# Altium PCB Smartknob.PcbDoc (part 1 of 2)
Units mm, origin at the board's own origin, x right, y up, seen from the top; angles counter-clockwise.
Board outline 81.2 x 81.2 mm, 4 copper layers (Top Layer, Int1, Int2, Bottom Layer), stack 1.109 mm thick; 105 components, 69 nets, 354 pads, 140 vias.
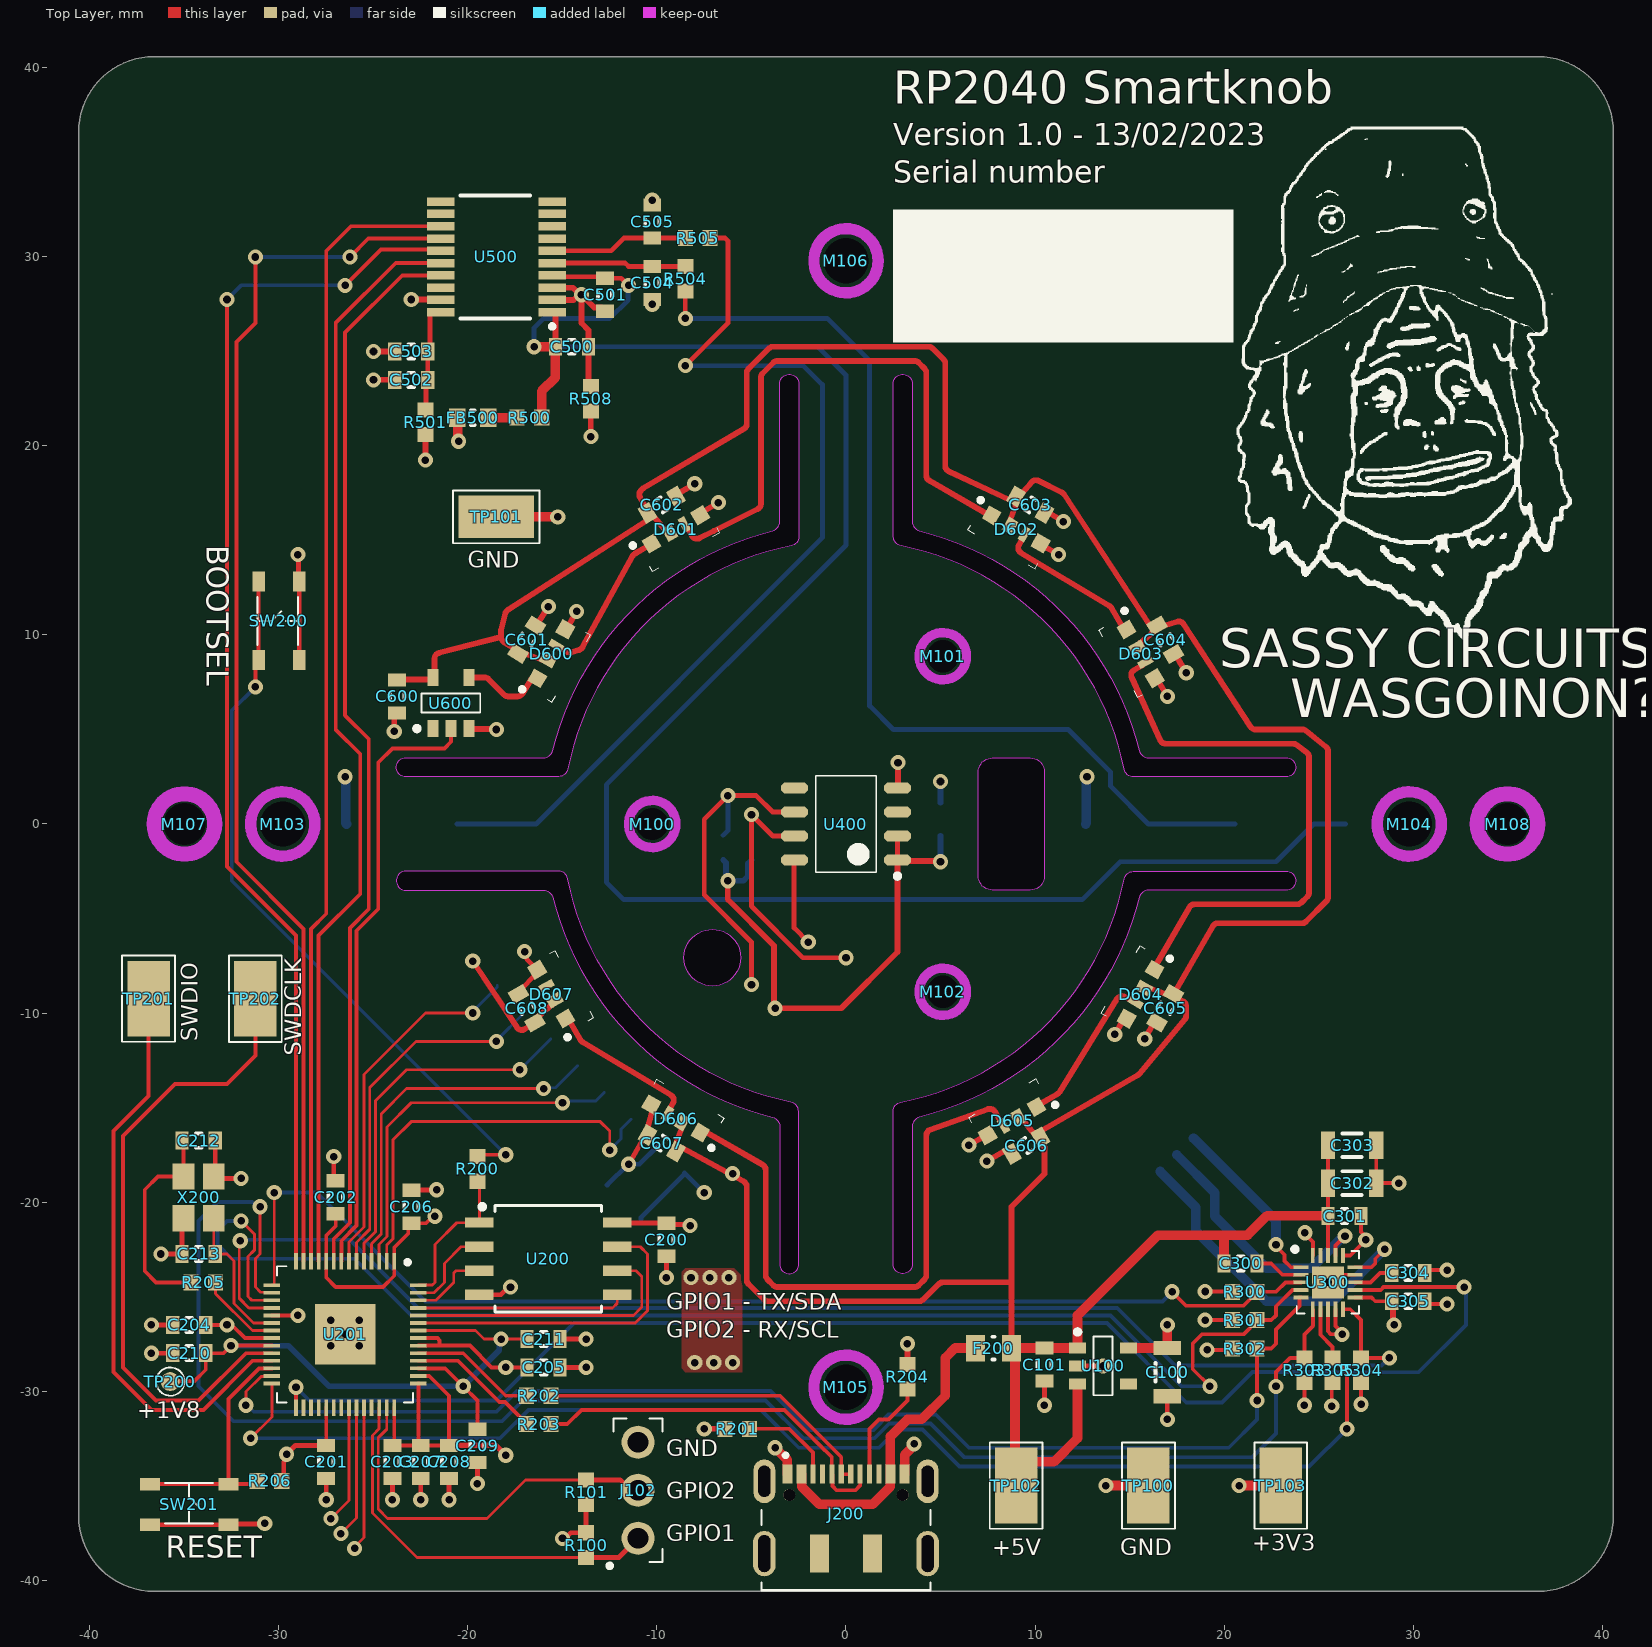
[diagram p0: Top Layer view]
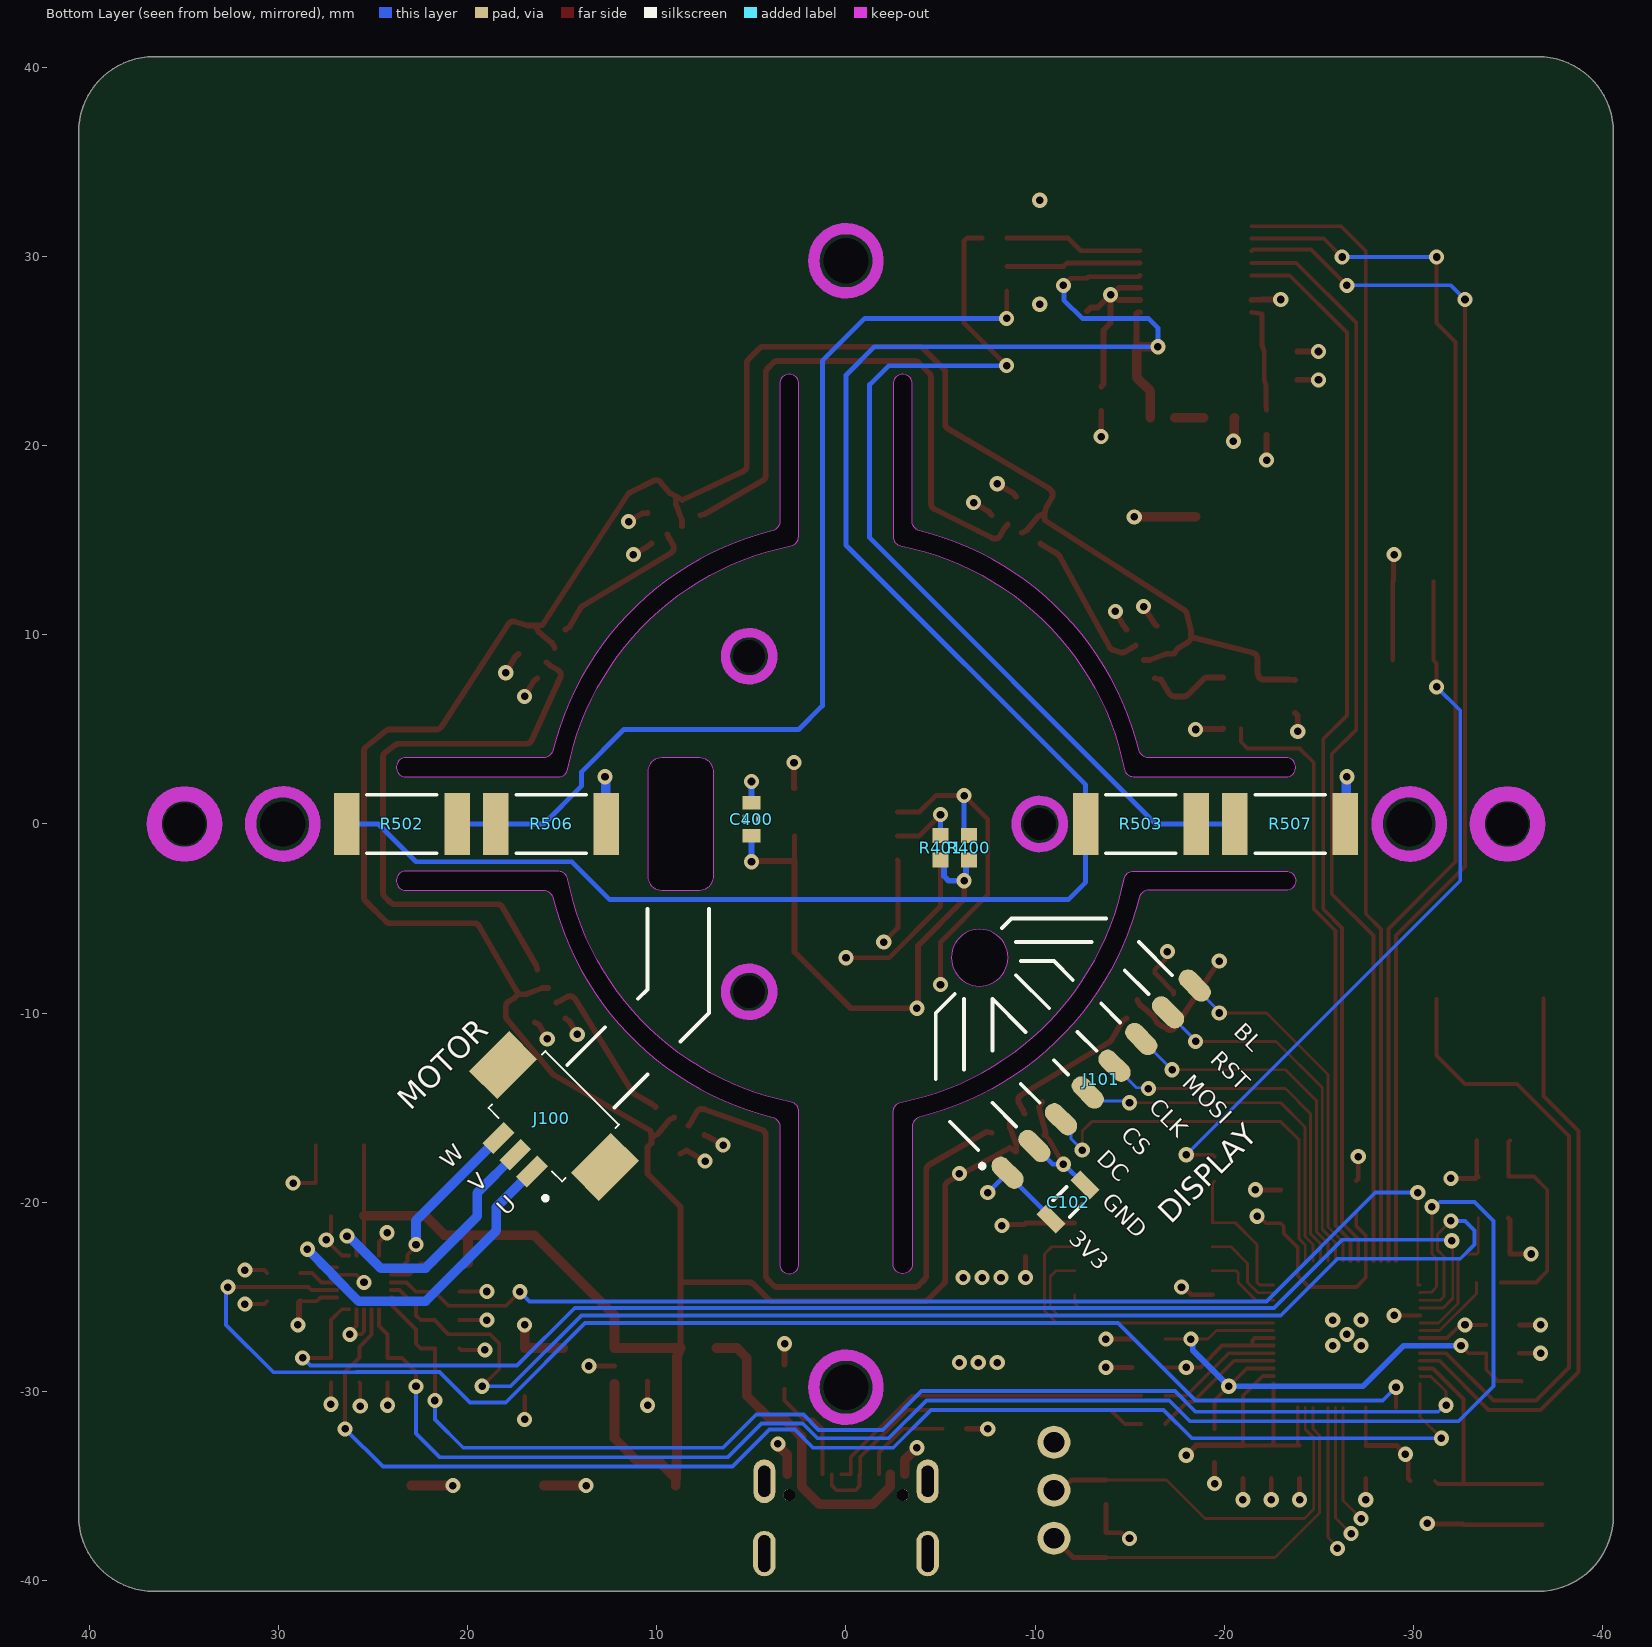
[diagram p1: Bottom Layer view, seen from below]
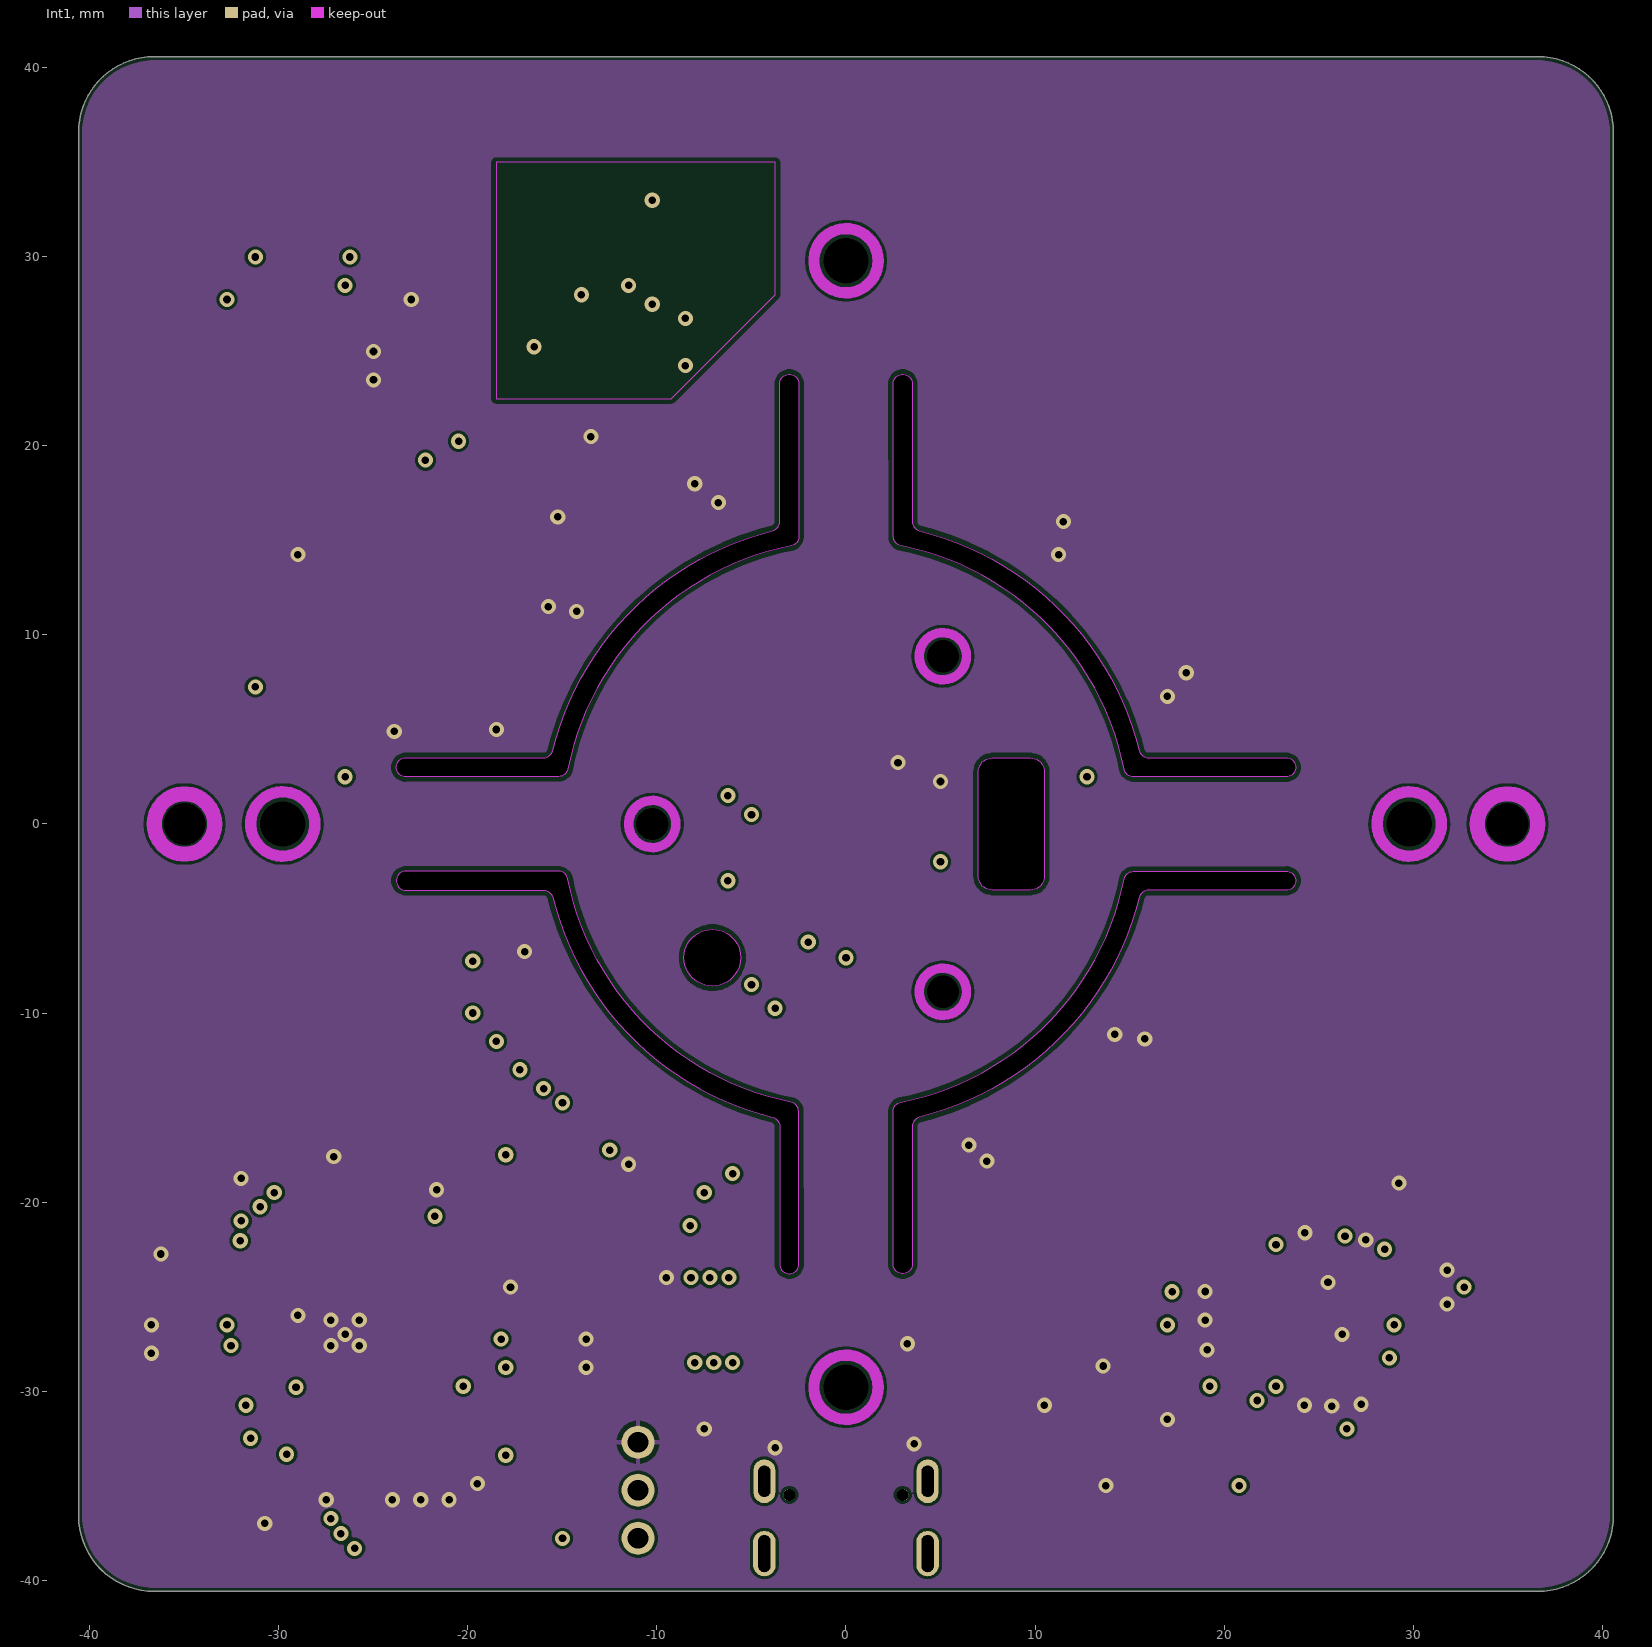
[diagram p2: Int1]
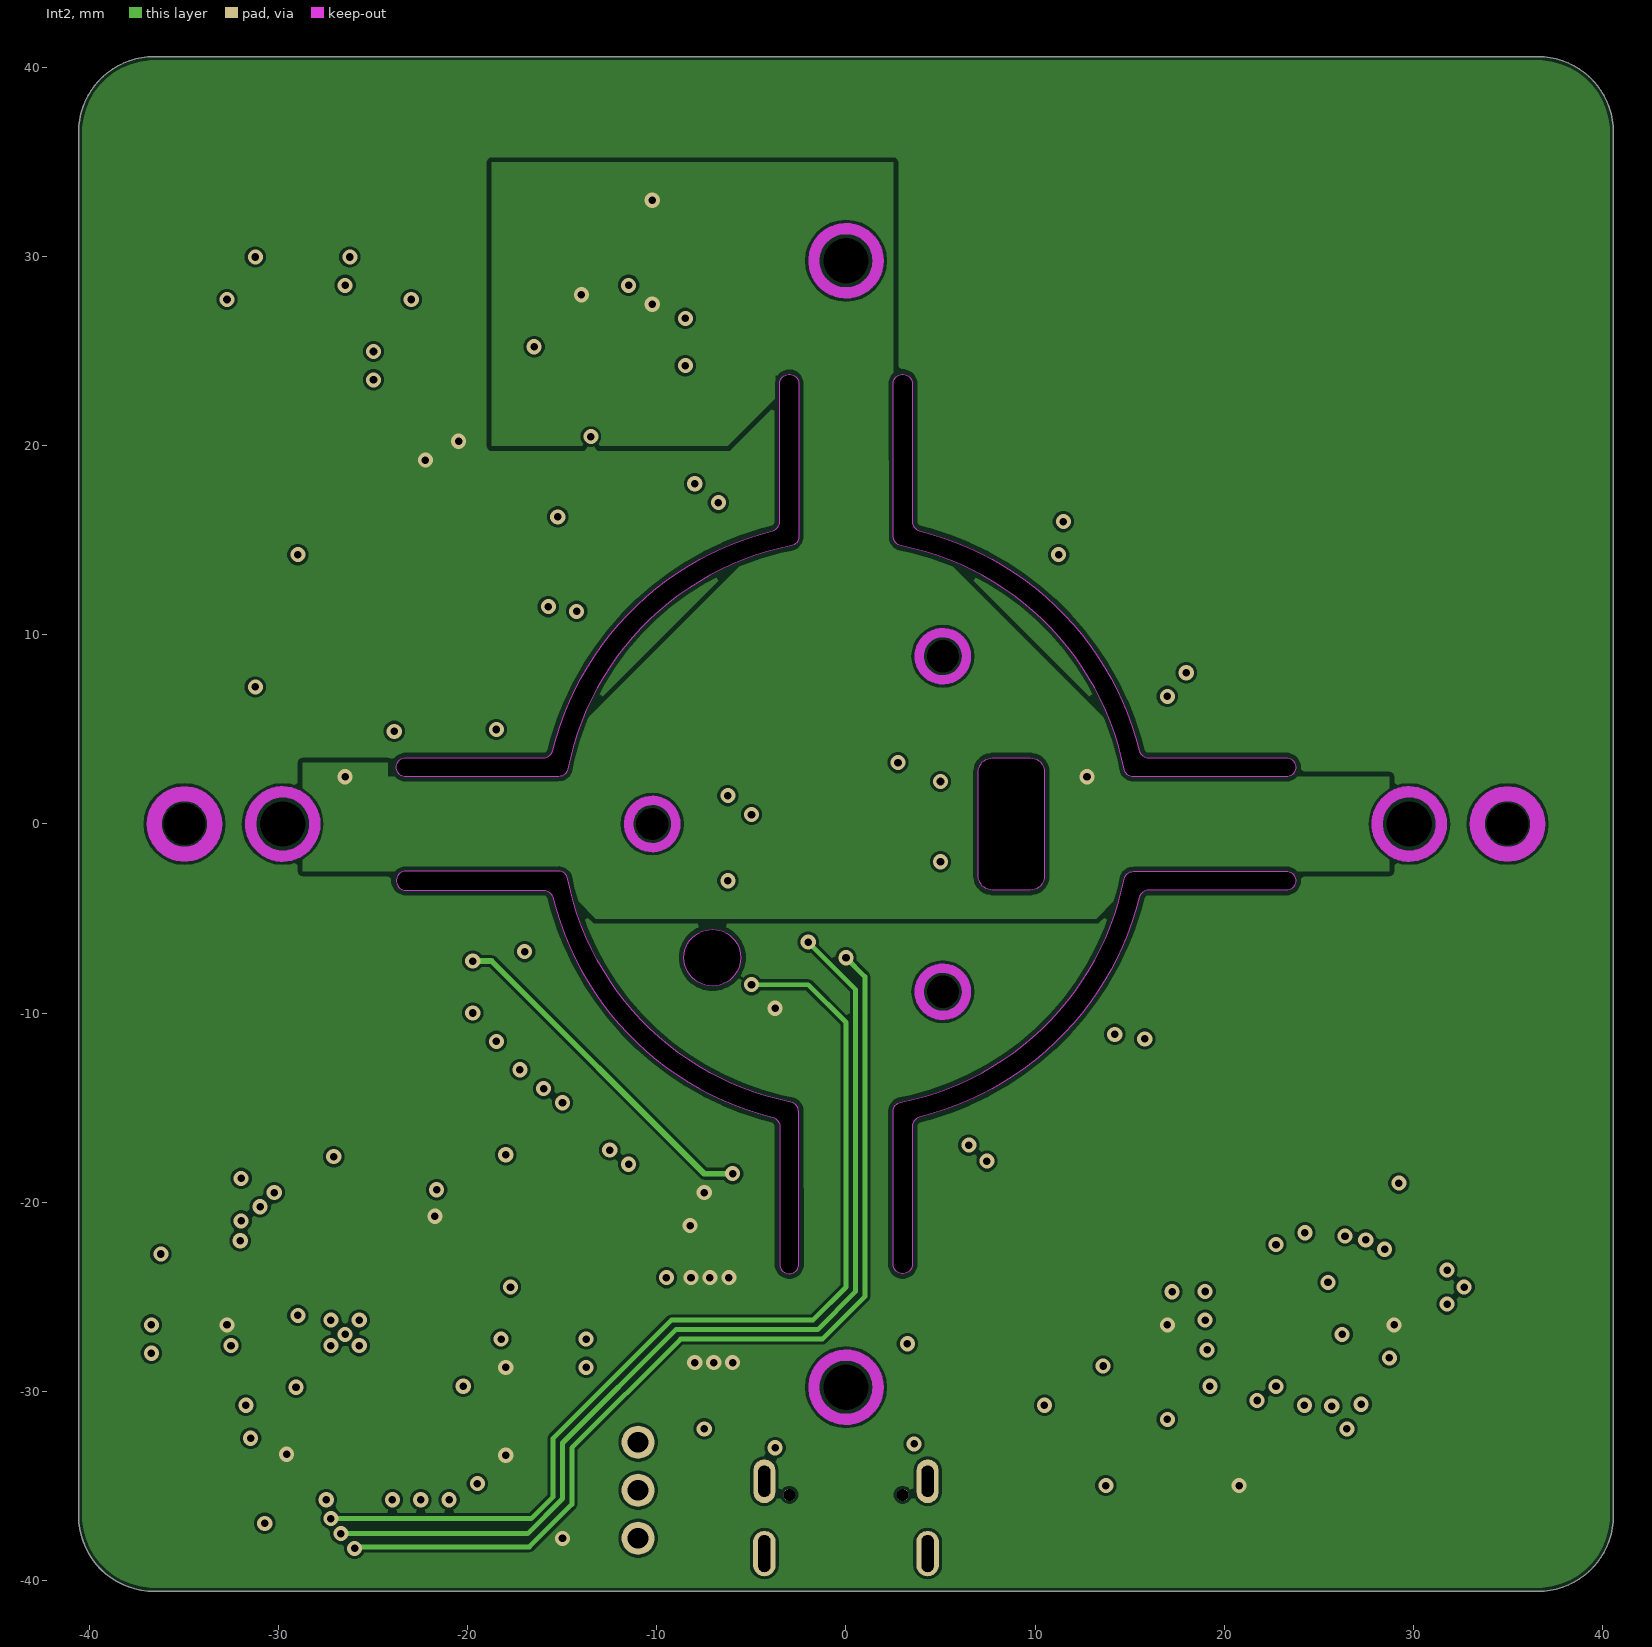
[diagram p3: Int2]
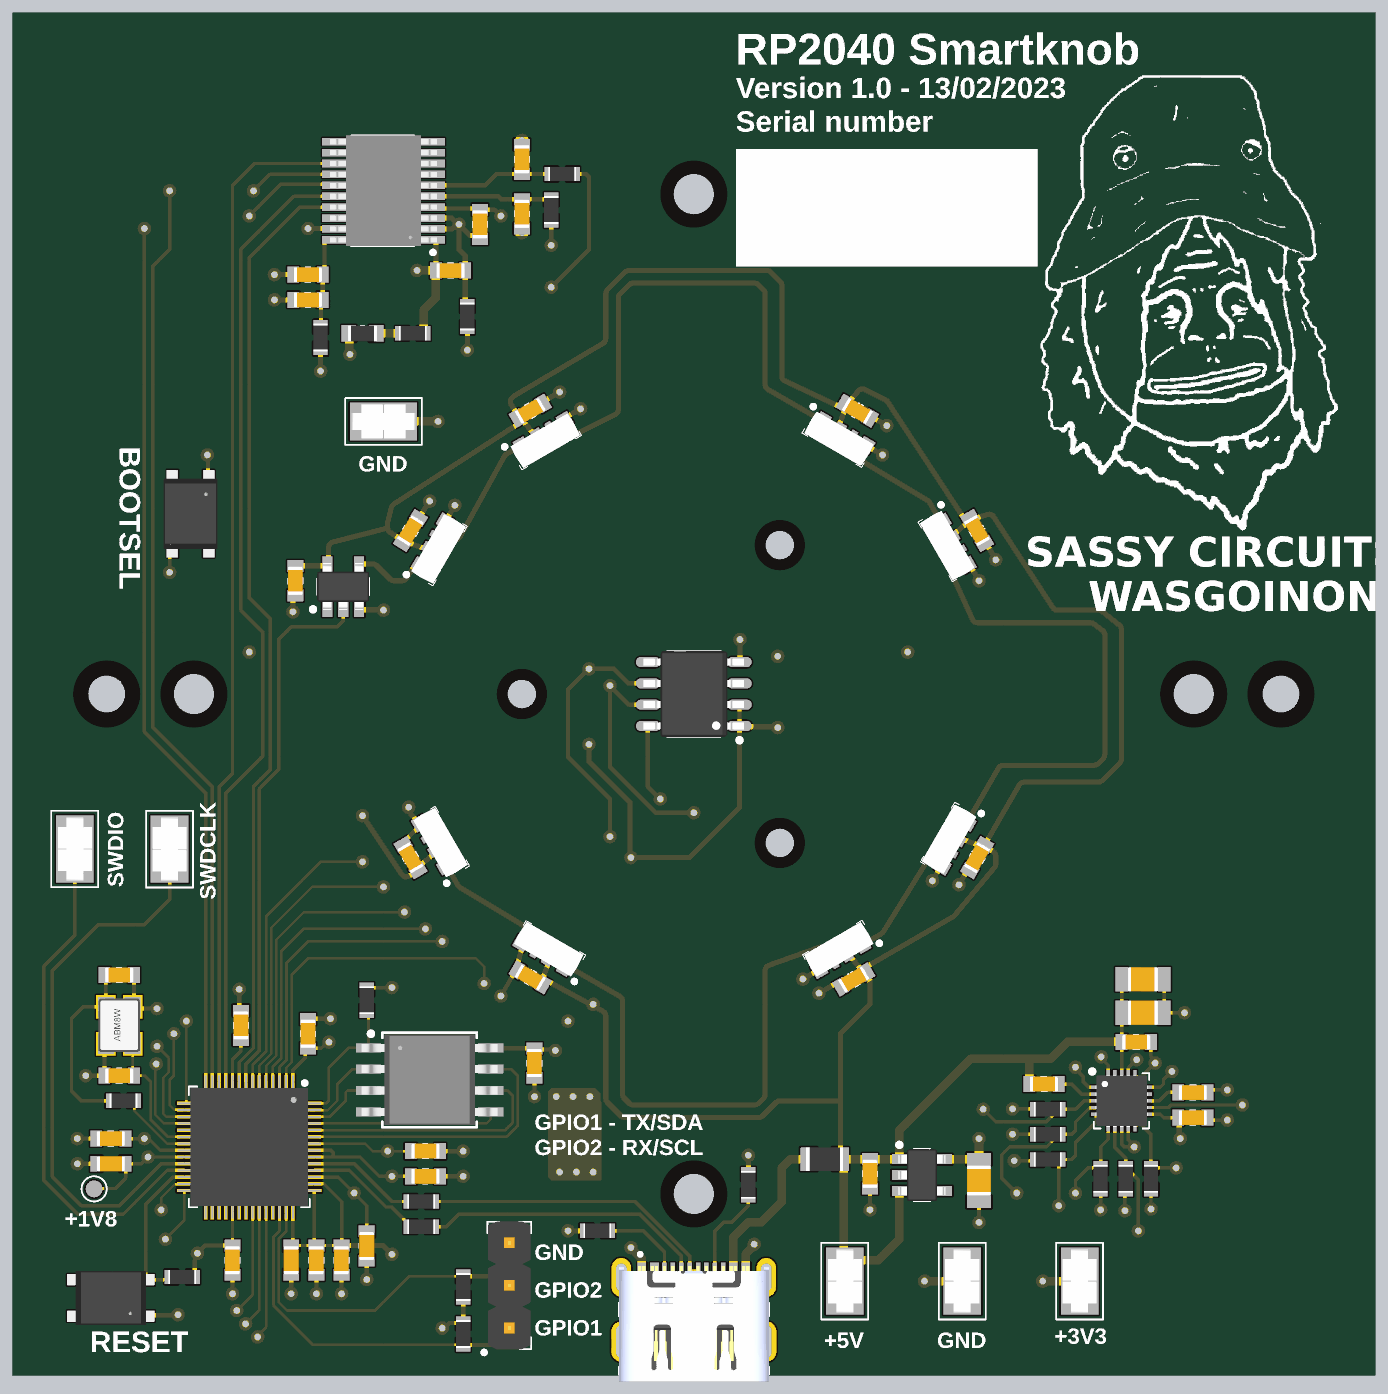
[diagram p5: 3D render of the assembled board from above, using the file's embedded part models]
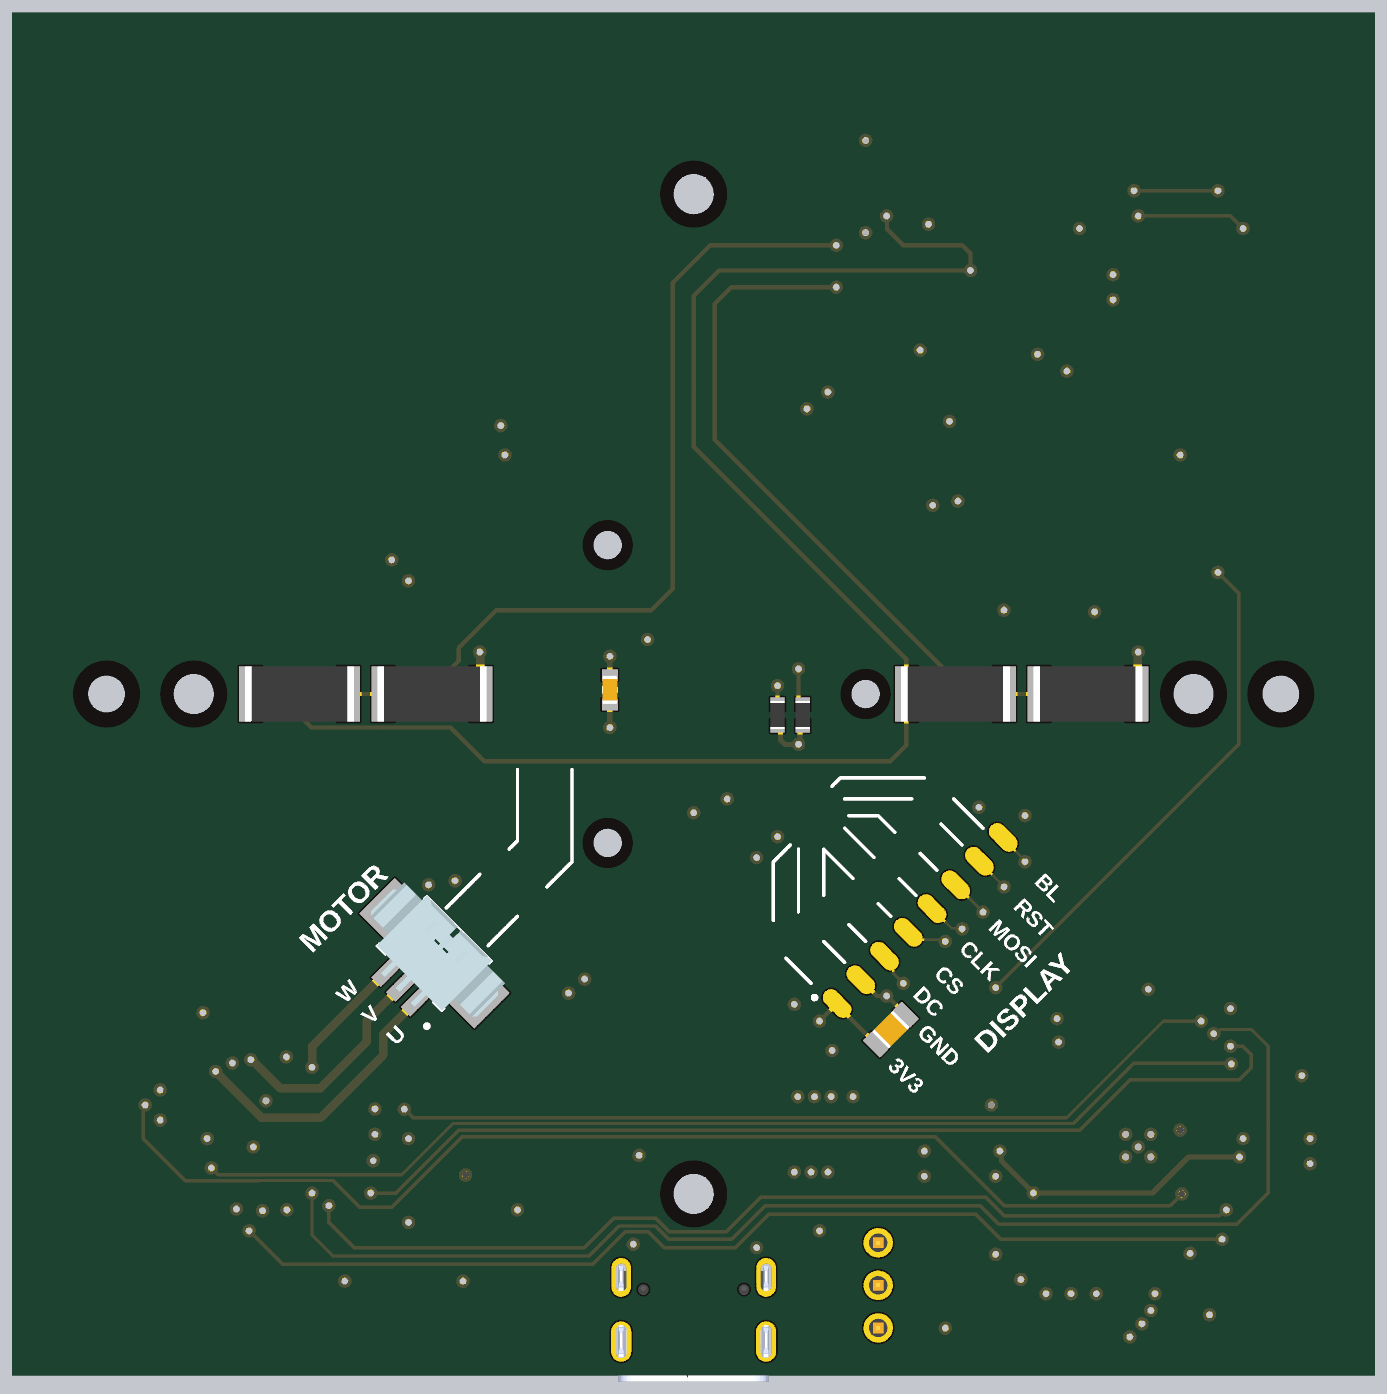
[diagram p6: 3D render of the assembled board from below, using the file's embedded part models]

## Layer stack, top to bottom
Top Solder: solder mask 0.0254, SM-001, Dk 4
Top Layer: signal copper 0.035
Dielectric 1: prepreg 0.1295, PP-017, Dk 4.3
Dielectric 2: prepreg 0.1295, PP-017, Dk 4.3
Int1: signal copper 0.035
Dielectric 3: core 0.451, Core-039, Dk 4.8
Int2: signal copper 0.035
Dielectric 4: prepreg 0.1295, PP-017, Dk 4.3
Dielectric 5: prepreg 0.1295, PP-017, Dk 4.3
Bottom Layer: signal copper 0.035
Bottom Solder: solder mask 0.0254, SM-001, Dk 4

## Board outline
-36.6,-40.6 36.6,-40.6 ccw(c36.6,-36.6) 40.6,-36.6 40.6,36.6 ccw(c36.6,36.6) 36.6,40.6 -36.6,40.6 ccw(c-36.6,36.6) -40.6,36.6 -40.6,-36.6 ccw(c-36.6,-36.6)
cut-out: -23.29,-3.5 -16.007,-3.5 -16.007,-3.502 cw(c-16.007,-4.002) -15.522,-3.88 ccw(c0,0) -3.881,-15.522 cw(c-4.002,-16.007) -3.502,-16.007 -3.5,-23.29 ccw(c-3,-23.29) -2.5,-23.29 -2.51,-15.205 ccw(c-3.01,-15.205) -2.913,-14.714 cw(c0,0) -14.715,-2.908 -14.716,-2.903 ccw(c-15.207,-3) -15.207,-2.5 -23.29,-2.5 ccw(c-23.29,-3)
cut-out: 2.5,-23.29 2.5,-15.207 cw(c3,-15.207) 2.903,-14.716 2.908,-14.715 ccw(c0,0) 14.714,-2.913 cw(c15.205,-3.01) 15.205,-2.51 23.29,-2.5 cw(c23.29,-3) 23.29,-3.5 16.007,-3.502 ccw(c16.007,-4.002) 15.522,-3.88 cw(c0,0) 3.881,-15.522 ccw(c4.002,-16.008) 3.502,-16.007 3.5,-16.007 3.5,-23.29 cw(c3,-23.29)
cut-out: 2.51,15.205 2.5,23.29 cw(c3,23.29) 3.5,23.29 3.502,16.007 ccw(c4.002,16.007) 3.88,15.522 cw(c0,0) 15.522,3.881 ccw(c16.008,4.002) 16.007,3.502 16.007,3.5 23.29,3.5 cw(c23.29,3) 23.29,2.5 15.207,2.5 cw(c15.207,3) 14.716,2.903 14.715,2.908 ccw(c0,0) 2.913,14.714 cw(c3.01,15.205)
cut-out: -23.29,2.5 cw(c-23.29,3) -23.29,3.5 -16.007,3.502 ccw(c-16.007,4.002) -15.522,3.88 cw(c0,0) -3.881,15.522 ccw(c-4.002,16.008) -3.502,16.007 -3.5,16.007 -3.5,23.29 cw(c-3,23.29) -2.5,23.29 -2.5,15.207 cw(c-3,15.207) -2.903,14.716 -2.908,14.715 ccw(c0,0) -14.714,2.913 cw(c-15.205,3.01) -15.205,2.51
cut-out: 7,-2.75 7,2.75 cw(c7.75,2.75) 7.75,3.5 9.75,3.5 cw(c9.75,2.75) 10.5,2.75 10.5,-2.75 cw(c9.75,-2.75) 9.75,-3.5 7.75,-3.5 cw(c7.75,-2.75)
cut-out: -7.071,-8.571 cw(c-7.071,-7.071) -8.571,-7.071 cw(c-7.071,-7.071) -7.071,-5.571 cw(c-7.071,-7.071) -5.571,-7.071 cw(c-7.071,-7.071)

## Design rules (kind name [scope] priority, off if disabled: settings)
BoardOutlineClearance [All] p1: gap=0.2 ignorepadtopadclearanceinfootprint=FALSE
Clearance [All] p1: gap=0.152 ignorepadtopadclearanceinfootprint=FALSE except(0: Arc-Hole Track-Hole SMDPad-Hole THPad-Hole Via-Hole Fill-Hole Poly-Hole Region-Hole Text-Hole; 0.127: Arc-Arc Arc-Track Track-Track SMDPad-SMDPad; 0.2: Arc-THPad Track-THPad; 0.254: Arc-Via Track-Via Fill-Fill Fill-Poly Fill-Region Poly-Poly Poly-Region Region-Region; 0.5: THPad-THPad)
ComponentClearance [All] p1 off: gap=0 collisioncheckmode=3 verticalgap=0.254 showdistances=FALSE
HoleSize [All] p1: absolutevalues=TRUE maxlimit=6 minlimit=0.2 maxpercent=80.000 minpercent=20.000
HoleToHoleClearance [All] p1: gap=0.5 allowstackedmicrovias=TRUE
MinimumAnnularRing [All] p1: minimumring=0.15
MinimumSolderMaskSliver [All] p1: minsoldermaskwidth=0.05
PolygonConnect [All] p1: thpad.connectstyle=Relief thpad.reliefconductorwidth=0.254 thpad.reliefentries=4 thpad.polygonreliefangle="90 Angle" thpad.airgapwidth=0.254 smdpad.connectstyle=Relief smdpad.reliefconductorwidth=0.254 smdpad.reliefentries=4 smdpad.polygonreliefangle="90 Angle" smdpad.airgapwidth=0.254 via.connectstyle=Direct via.reliefconductorwidth=0.254 via.reliefentries=4 via.polygonreliefangle="90 Angle" via.airgapwidth=0.254
RoutingVias [All] p1: holewidth=0.4 width=1 viastyle="Through Hole" minholewidth=0.3 minwidth=0.6 maxholewidth=2 maxwidth=3
SilkToSolderMaskClearance [IsPad] p1: minsilkscreentomaskgap=0.1 clearancetoexposedcopper=TRUE
SolderMaskExpansion [All] p1: expansion=0.102 istentingtop=FALSE
Width [All] p1: maxlimit=5 minlimit=0.127 preferedwidth=0.203 minimp=50.000000 maximp=50.000000 favimp=50.000000
25 further rules are at their usual default settings.

## Classes and differential pairs
component class Strain_sensor: C500 C501 C502 C503 C504 C505 FB500 R500 R501 R502 R503 R504 R505 R506 R507 R508 U500
component class RGB_LEDs: C600 C601 C602 C603 C604 C605 C606 C607 C608 D600 D601 D602 D603 D604 D605 D606 D607 U600
component class Motor_driver: C300 C301 C302 C303 C304 C305 R300 R301 R302 R303 R304 R305 U300
component class Microcontroller: C200 C201 C202 C203 C204 C205 C206 C207 C208 C209 C210 C211 C212 C213 F200 J200 R200 R201 R202 R203 R204 R205 R206 SW200 SW201 TP200 TP201 TP202 U200 U201 X200
component class Main: C100 C101 C102 J100 J101 J102 M100 M101 M102 M103 M104 M105 M106 M107 M108 R100 R101 TP100 TP101 TP102 TP103 U100
component class Magnetic_encoder: C400 R400 R401 U400

## Components (designator, comment, footprint, x,y, rotation, side; value= is the part's Value field where it differs from the comment)
C100 "CAP" C0805 17,-29 r270 top value=2.2uF
C101 "CAP" C0603 10.5,-28.6 r270 top value=1uF
C102 "CAP" C0805 -11.75,-20 r135 bottom value=10uF
C200 "CAP" C0603 -9.5,-22 r270 top value=100nF
C201 "CAP" C0603 -27.5,-33.75 r270 top value=100nF
C202 "CAP" C0603 -27,-19.75 r90 top value=100nF
C203 "CAP" C0603 -24,-33.75 r270 top value=100nF
C204 "CAP" C0603 -34.75,-26.5 r180 top value=100nF
C205 "CAP" C0603 -16,-28.75 r0 top value=100nF
C206 "CAP" C0603 -23,-20.25 r90 top value=100nF
C207 "CAP" C0603 -22.5,-33.75 r270 top value=100nF
C208 "CAP" C0603 -21,-33.75 r270 top value=1uF
C209 "CAP" C0603 -19.5,-32.9 r270 top value=1uF
C210 "CAP" C0603 -34.75,-28 r180 top value=100nF
C211 "CAP" C0603 -16,-27.25 r0 top value=100nF
C212 "CAP" C0603 -34.25,-16.75 r180 top value=33pF
C213 "CAP" C0603 -34.25,-22.75 r0 top value=33pF
C300 "CAP" C0603 20.875,-23.25 r0 top value=100nF
C301 "CAP" C0603 26.375,-20.75 r0 top value=100nF
C302 "CAP" C0805 26.775,-19 r0 top value=10uF
C303 "CAP" C0805 26.775,-17 r0 top value=10uF
C304 "CAP" C0603 29.75,-23.75 r0 top value=100nF
C305 "CAP" C0603 29.75,-25.25 r0 top value=100nF
C400 "CAP" C0603 5,0.25 r90 bottom value=100nF
C500 "CAP" C0603 -14.5,25.25 r0 top value=100nF
C501 "CAP" C0603 -12.75,28 r270 top value=100nF
C502 "CAP" C0603 -23,23.5 r180 top value=100nF
C503 "CAP" C0603 -23,25 r0 top value=100nF
C504 "CAP" C0603 -10.25,28.625 r270 top value=1uF
C505 "CAP" C0603 -10.25,31.875 r90 top value=1uF
C600 "CAP" C0603 -23.75,6.75 r270 top value=100nF
C601 "CAP" C0603 -16.887,9.75 r57.88 top value=100nF
C602 "CAP" C0603 -9.75,16.887 r30 top value=100nF
C603 "CAP" C0603 9.75,16.887 r330 top value=100nF
C604 "CAP" C0603 16.887,9.75 r300 top value=100nF
C605 "CAP" C0603 16.887,-9.75 r240 top value=100nF
C606 "CAP" C0603 9.533,-17.012 r210 top value=100nF
C607 "CAP" C0603 -9.75,-16.887 r150 top locked value=100nF
C608 "CAP" C0603 -16.887,-9.75 r120 top locked value=100nF
D600 "LED_NEOPIXEL" SK6812B_SIDE -15.155,8.75 r60 top locked value=RGB
D601 "LED_NEOPIXEL" SK6812B_SIDE -8.75,15.155 r30 top locked value=RGB
D602 "LED_NEOPIXEL" SK6812B_SIDE 8.75,15.155 r330 top locked value=RGB
D603 "LED_NEOPIXEL" SK6812B_SIDE 15.155,8.75 r300 top locked value=RGB
D604 "LED_NEOPIXEL" SK6812B_SIDE 15.155,-8.75 r240 top value=RGB
D605 "LED_NEOPIXEL" SK6812B_SIDE 8.533,-15.28 r210 top value=RGB
D606 "LED_NEOPIXEL" SK6812B_SIDE -8.75,-15.155 r150 top locked value=RGB
D607 "LED_NEOPIXEL" SK6812B_SIDE -15.155,-8.75 r120 top locked value=RGB
F200 "F_PTC" F0805 7.8,-27.725 r0 top value="500 mA"
FB500 "FBEAD" 0603_IND -19.75,21.5 r180 top
J100 "Conn-3pos" 0532610371 16.475,-16.475 r225 bottom locked
J101 "Conn-8pos" 2mm_pads_8 -13.5,-13.5 r135 bottom
J102 "Conn-3pos" 2.54mm_header_vertical_male -11,-35.25 r90 top
J200 "DX07S016JA1R1500" DX07S016JA1R1500 0,-37 r0 top
M100 "Mounting_Hole_Unplated" M1.6_Close_Unplated -10.25,0 r0 top locked
M101 "Mounting_Hole_Unplated" M1.6_Close_Unplated 5.125,8.877 r60 top locked
M102 "Mounting_Hole_Unplated" M1.6_Close_Unplated 5.125,-8.877 r300 top locked
M103 "Mounting_Hole_Unplated" M2_Normal_Unplated -29.8,0 r0 top locked
M104 "Mounting_Hole_Unplated" M2_Normal_Unplated 29.8,0 r0 top locked
M105 "Mounting_Hole_Unplated" M2_Normal_Unplated 0,-29.8 r0 top locked
M106 "Mounting_Hole_Unplated" M2_Normal_Unplated 0,29.8 r0 top locked
M107 "Mounting_Hole_Unplated" M2_Close_Unplated -35,0 r0 top locked
M108 "Mounting_Hole_Unplated" M2_Close_Unplated 35,0 r0 top locked
R100 "RES" R0603 -13.75,-38.15 r90 top value=2K2
R101 "RES" R0603 -13.75,-35.35 r270 top value=2K2
R200 "RES" R0603 -19.5,-18.25 r270 top value=1K
R201 "RES" R0603 -5.75,-32 r0 top value=5K1
R202 "RES" R0603 -16.25,-30.25 r0 top value=27R
R203 "RES" R0603 -16.25,-31.75 r0 top value=27R
R204 "RES" R0603 3.25,-29.25 r270 top value=5K1
R205 "RES" R0603 -34,-24.25 r0 top value=1K
R206 "RES" R0603 -30.5,-34.75 r0 top value=10K
R300 "RES" R0603 21.1,-24.75 r0 top value=10K
R301 "RES" R0603 21.1,-26.25 r0 top value=10K
R302 "RES" R0603 21.1,-27.75 r0 top value=10K
R303 "RES" R0603 24.25,-28.9 r90 top value=10K
R304 "RES" R0603 27.25,-28.9 r90 top value=10K
R305 "RES" R0603 25.75,-28.9 r90 top value=10K
R400 "RES" R0603 -6.5,-1.25 r270 bottom value=2K2
R401 "RES" R0603 -5,-1.25 r270 bottom value=2K2
R500 "RES" R0603 -16.75,21.5 r180 top value=10R
R501 "RES" R0603 -22.25,21.25 r270 top value=10R
R502 "RES" R2512 23.5,0 r0 bottom locked value=330R
R503 "RES" R2512 -15.6,0 r0 bottom locked value=330R
R504 "RES" R0603 -8.5,28.85 r270 top value=100R
R505 "RES" R0603 -7.85,31 r180 top value=100R
R506 "RES" R2512 15.6,0 r0 bottom locked value=330R
R507 "RES" R2512 -23.5,0 r0 bottom locked value=330R
R508 "RES" R0603 -13.5,22.5 r270 top value=0R
SW200 "Pushbutton" 434133025816 -30,10.75 r270 top
SW201 "Pushbutton" 434133025816 -34.75,-36 r180 top
TP100 "Testpoint" 5019 16,-35 r270 top
TP101 "Testpoint" 5019 -18.5,16.25 r180 top
TP102 "Testpoint" 5019 9,-35 r270 top
TP103 "Testpoint" 5019 23,-35 r270 top
TP200 "Testpoint" TP_SMD -35.75,-29.5 r0 top
TP201 "Testpoint" 5019 -36.899,-9.236 r270 top
TP202 "Testpoint" 5019 -31.25,-9.25 r270 top
U100 "XC6222B331MR-G" SOT-25-5 13.6,-28.675 r0 top
U200 "W25Q128JVSIQ" 8-SOIC-WIDE -15.75,-23 r0 top
U201 "RP2040" RP2040 -26.5,-27 r270 top
U300 "TMC6300" TMC6300 25.5,-24.25 r0 top
U400 "MT6701" SOP-8 0,0 r180 top locked
U500 "MCP3564R" 20-TSSOP -18.5,30 r90 top
U600 "SN74LV1T34" SOT-25-5 -20.9,6.4 r90 top
X200 "XTAL-4" "XTAL 3.2x2.5mm" -34.25,-19.75 r90 top value="12 MHz"

## Footprints (in the part's own frame and the unit in brackets; to place one, negate y for a bottom-side part, rotate by r counter-clockwise, add the part's x,y. Pads: shape width x height; smd on the part's side, far side on the other; paste and mask are expansions set on the pad)
2.54mm_header_vertical_male [mm]
  round 1.75 hole 1.1: 1(-2.54,0) 2(0,0) 3(2.54,0)
  silkscreen extent -4.1,-1.3 3.8,1.6, body extent -3.81,-1.27 3.81,1.27, height 8.57
2mm_pads_8 [mm]
  oval 1x2 smd paste-2539.97: 1(-7,0) 2(-5,0) 3(-3,0) 4(-1,0) 5(1,0) 6(3,0) 7(5,0) 8(7,0)
  silkscreen extent -7.8,1.1 -7.6,1.3
8-SOIC-WIDE [mil]
  rect 59.56x20.97 smd paste+0 mask+0: 1(-143.5,75) 2(-143.5,25) 3(-143.5,-25) 4(-143.5,-75) 5(143.5,-75) 6(143.5,-25) 7(143.5,25) 8(143.5,75)
  silkscreen extent -143,-111 111,113, body extent -159,-106 159,106, height 85
20-TSSOP [mm]
  rect 0.45x1.45 smd mask+0.075: 1(-2.925,-2.95) 2(-2.275,-2.95) 3(-1.625,-2.95) 4(-0.975,-2.95) 5(-0.325,-2.95) 6(0.325,-2.95) 7(0.975,-2.95) 8(1.625,-2.95) 9(2.275,-2.95) 10(2.925,-2.95) 11(2.925,2.95) 12(2.275,2.95) 13(1.625,2.95) 14(0.975,2.95) 15(0.325,2.95) 16(-0.325,2.95) 17(-0.975,2.95) 18(-1.625,2.95) 19(-2.275,2.95) 20(-2.925,2.95)
  silkscreen extent -3.77,-3.05 3.25,1.9, body extent -3.3,-3.2 3.3,3.2, height 1.2
0603_IND [mm]
  rect 0.87x0.98 smd: 1(-0.82,0) 2(0.82,0)
  silkscreen extent -0.1,-0.39 0.1,0.39, body extent -0.87,-0.48 0.87,0.48, height 0.95
5019 [mm]
  rect 4x2.25 smd: 1(0,0)
  silkscreen extent -2.29,-1.4 2.29,1.4, body extent -1.91,-1.01 1.91,1.01, height 2.29
0532610371 [mm]
  rect 0.8x1.6 smd: 1(1.25,-1.45) 2(0,-1.45) 3(-1.25,-1.45)
  rect 2.1x3 smd: ""(-3.8,1.45) ""(3.8,1.45)
  silkscreen extent -2.75,-2.05 2.85,3.55, body extent -4.45,-1.65 4.45,3.55, height 3.2
434133025816 [mm]
  rect 1.05x0.65 smd: 1(-2.075,1.075) 1(2.075,1.075) 2(-2.075,-1.075) 2(2.075,-1.075)
  silkscreen extent -1.27,-1.14 1.27,1.02, body extent -2.6,-1.6 2.6,1.6, height 2.7
C0603 [mm]
  rect 0.7x0.95 smd: 1(-0.875,0) 2(0.875,0)
  silkscreen extent -0.15,-0.38 0.15,0.38, body extent -0.85,-0.45 0.85,0.45, height 0.9
C0805 [mm]
  rect 0.75x1.45 smd: 1(-1.275,0) 2(1.275,0)
  silkscreen extent -0.5,-0.63 0.5,0.63, body extent -0.9,-0.72 0.9,0.72, height 1.45
DX07S016JA1R1500 [mm]
  rect 0.52x1 smd: 1(-3.1,2.6) 2(-2.35,2.6) 11(2.35,2.6) 12(3.1,2.6)
  rect 0.27x1 smd: 3(-1.75,2.6) 4(-1.25,2.6) 5(-0.75,2.6) 6(-0.25,2.6) 7(0.25,2.6) 8(0.75,2.6) 9(1.25,2.6) 10(1.75,2.6)
  rect 1x2 smd: S1(-1.4,-1.6) S2(1.4,-1.6)
  oval 1.158x2.316 hole 0.65 slot 1.65 at 90 deg: S3(-4.32,2.225) S4(4.32,2.225)
  oval 1.2x2.4 hole 0.65 slot 1.95 at 90 deg: S5(-4.32,-1.6) S6(4.32,-1.6)
  round 0.63 hole 0.63 unplated: ""(-3,1.5) ""(3,1.5)
  silkscreen extent -4.47,-3.55 4.47,3.7, body extent -4.47,-3.98 4.47,2.92, height 3.31
F0805 [mm]
  rect 1x1.4 smd: 1(-0.95,0) 2(0.95,0)
  silkscreen extent -0.05,-0.6 0.05,0.6, body extent -1.1,-0.7 1.1,0.7, height 0.5
M1.6_Close_Unplated [mm]
  round 0 hole 1.7 unplated mask+1.5: 1(0,0)
  Keep-Out Layer circle w0.5: c0,0 r1.25
M2_Close_Unplated [mm]
  round 0 hole 2.2 unplated mask+2: 1(0,0)
  Keep-Out Layer circle w0.8: c0,0 r1.6
M2_Normal_Unplated [mm]
  round 0 hole 2.4 unplated mask+2: 1(0,0)
  Keep-Out Layer circle w0.6: c0,0 r1.7
R0603 [mm]
  rect 0.8x0.85 smd: 1(-0.65,0) 2(0.65,0)
  body extent -0.82,-0.43 0.82,0.43, height 0.5
R2512 [mm]
  rect 1.35x3.3 smd: 1(-2.925,0) 2(2.925,0)
  silkscreen extent -1.85,-1.55 1.85,1.55, body extent -3.25,-1.65 3.25,1.65, height 0.7
RP2040 [mm]
  rect 0.875x0.2 smd paste-0.04: 1(-3.875,2.6) 2(-3.875,2.2) 3(-3.875,1.8) 4(-3.875,1.4) 5(-3.875,1) 6(-3.875,0.6) 7(-3.875,0.2) 8(-3.875,-0.2) 9(-3.875,-0.6) 10(-3.875,-1) 11(-3.875,-1.4) 12(-3.875,-1.8) 13(-3.875,-2.2) 14(-3.875,-2.6) 29(3.875,-2.6) 30(3.875,-2.2) 31(3.875,-1.8) 32(3.875,-1.4) 33(3.875,-1) 34(3.875,-0.6) 35(3.875,-0.2) 36(3.875,0.2) 37(3.875,0.6) 38(3.875,1) 39(3.875,1.4) 40(3.875,1.8) 41(3.875,2.2) 42(3.875,2.6)
  rect 0.2x0.875 smd paste-0.04: 15(-2.6,-3.875) 16(-2.2,-3.875) 17(-1.8,-3.875) 18(-1.4,-3.875) 19(-1,-3.875) 20(-0.6,-3.875) 21(-0.2,-3.875) 22(0.2,-3.875) 23(0.6,-3.875) 24(1,-3.875) 25(1.4,-3.875) 26(1.8,-3.875) 27(2.2,-3.875) 28(2.6,-3.875) 43(2.6,3.875) 44(2.2,3.875) 45(1.8,3.875) 46(1.4,3.875) 47(1,3.875) 48(0.6,3.875) 49(0.2,3.875) 50(-0.2,3.875) 51(-0.6,3.875) 52(-1,3.875) 53(-1.4,3.875) 54(-1.8,3.875) 55(-2.2,3.875) 56(-2.6,3.875)
  rect 3.2x3.2 smd paste-0.6: GND(0,0)
  silkscreen extent -3.91,-3.6 3.6,3.6, body extent -3.5,-3.5 3.51,3.51, height 0.89
SK6812B_SIDE [mm]
  rect 0.75x0.8 smd: 1(-1.492,0.5)
  rect 0.6x0.8 smd: 2(-0.368,0.5)
  rect 0.4x0.8 smd: 3(0.513,0.5)
  rect 0.8x0.8 smd: 4(1.493,0.5)
  silkscreen extent -2.5,-0.8 1.91,1, body extent -2.12,-0.75 1.88,0.75, height 2.05
SOP-8 [mm]
  oval 1.45x0.6 smd: 1(-2.725,1.905) 2(-2.725,0.635) 3(-2.725,-0.635) 4(-2.725,-1.905) 5(2.725,-1.905) 6(2.725,-0.635) 7(2.725,0.635) 8(2.725,1.905)
  silkscreen extent -2.85,-2.55 1.6,2.88, body extent -3,-2.55 3,2.55, height 1.75
SOT-25-5 [mm]
  rect 0.9x0.6 smd: 1(-1.35,0.95) 2(-1.35,0) 3(-1.35,-0.95) 4(1.35,-0.95) 5(1.35,0.95)
  silkscreen extent -1.47,-1.55 0.5,1.92, body extent -1.4,-1.55 1.4,1.55, height 1.3
TMC6300 [mm]
  rect 0.8x0.2 smd: 1(-1.425,0.8) 2(-1.425,0.4) 3(-1.425,0) 4(-1.425,-0.4) 5(-1.425,-0.8) 11(1.425,-0.8) 12(1.425,-0.4) 13(1.425,0) 14(1.425,0.4) 15(1.425,0.8)
  rect 0.2x0.8 smd: 6(-0.8,-1.425) 7(-0.4,-1.425) 8(0,-1.425) 9(0.4,-1.425) 10(0.8,-1.425) 16(0.8,1.425) 17(0.4,1.425) 18(0,1.425) 19(-0.4,1.425) 20(-0.8,1.425)
  rect 1.7x1.7 smd: 21(0,0)
  silkscreen extent -1.87,-1.65 1.65,1.87, body extent -1.55,-1.55 1.55,1.55, height 0.9
TP_SMD [mm]
  round 1 smd: 1(0,0)
  silkscreen extent -0.75,-0.75 0.75,0.75
"XTAL 3.2x2.5mm" [mm]
  rect 1.4x1.15 smd paste-0.1: 1(-1.1,-0.8) 2(1.1,-0.8) 3(1.1,0.8) 4(-1.1,0.8)
  body extent -1.6,-1.25 1.6,1.25, height 0.75

## Part data
C100: library part CGA4J3X7R1C225K125AB, "General purpose ceramic capacitor", Manufacturer="TDK Corporation", Package Ref=C0805, Supplier Part No=445-5691-1-ND, Voltage=16V, Fitted=Fitted, Generic=Generic, Manufacturer Part No=CGA4J3X7R1C225K125AB, Part Reference=CGA4J3X7R1C225K125AB, Ready for use=y, Specification="X7R, 16V, AEC-Q200 Qualified", Supplier=Digi-Key
C101 C208 C209 C504 C505: library part CGA3E1X7R1V105K080AC, "General purpose ceramic capacitor", Manufacturer="TDK Corporation", Package Ref=C0603, Supplier Part No=445-174215-1-ND, Voltage=35V, Fitted=Fitted, Generic=Generic, Manufacturer Part No=CGA3E1X7R1V105K080AC, Part Reference=CGA3E1X7R1V105K080AC, Ready for use=y, Specification="X7R, 35V, AEC-Q200 Qualified", Supplier=Digi-Key
C102 C302 C303: library part CGA4J1X7S1C106K125AC, "General purpose ceramic capacitor", Manufacturer="TDK Corporation", Package Ref=C0805, Supplier Part No=445-16110-1-ND, Voltage=16V, Fitted=Fitted, Generic=Generic, Manufacturer Part No=CGA4J1X7S1C106K125AC, Part Reference=CGA4J1X7S1C106K125AC, Ready for use=y, Specification="X7S, 16V, AEC-Q200 Qualified", Supplier=Digi-Key
C200 C201 C202 C203 C204 C205 C206 C207 C210 C211 C300 C301 C304 C305 C400 C500 C501 C502 C503 C600 C601 C602 C603 C604 C605 C606 C607 C608: library part CGA3E2X7R1H104K080AA, "General purpose ceramic capacitor", Manufacturer="TDK Corporation", Package Ref=C0603, Supplier Part No=445-5666-1-ND, Voltage=50V, Fitted=Fitted, Generic=Generic, Manufacturer Part No=CGA3E2X7R1H104K080AA, Part Reference=CGA3E2X7R1H104K080AA, Ready for use=y, Specification="X7R, 50V, AEC-Q200 Qualified", Supplier=Digi-Key
C212 C213: library part CGA3E2C0G1H330J080AA, "General purpose ceramic capacitor", Manufacturer="TDK Corporation", Package Ref=C0603, Supplier Part No=445-5634-1-ND, Voltage=50V, Fitted=Fitted, Generic=Generic, Manufacturer Part No=CGA3E2C0G1H330J080AA, Part Reference=CGA3E2C0G1H330J080AA, Ready for use=y, Specification="C0G, 50V, AEC-Q200 Qualified", Supplier=Digi-Key
D600 D601 D602 D603 D604 D605 D606 D607: library part 4691, "Side mounted RGB neopixel", Manufacturer=Adafruit, Package Ref=SK6812B_SIDE, Supplier Part No=1528-4691-ND, Fitted=Fitted, Generic="Non Generic", Manufacturer Part No=4691, Part Reference=4691, Ready for use=y, Supplier=Digi-Key
F200: library part MF-PSMF050X-2, "PTC resettable SMD fuse", Manufacturer="Bourns Inc", Package Ref=F0805, Supplier Part No=MF-PSMF050X-2CT-ND, Fitted=Fitted, Generic=Generic, Manufacturer Part No=MF-PSMF050X-2, Part Reference=MF-PSMF050X-2, Ready for use=y, Specification="6V rated", Supplier=Digi-Key
FB500: library part FBTH1608HL221-T, "Ferrite bead", Manufacturer="Taiyo Yuden", Package Ref=0603_IND, Supplier Part No=587-FBTH1608HL221-TCT-ND, Fitted=Fitted, Generic=Generic, Manufacturer Part No=FBTH1608HL221-T, Part Reference=FBTH1608HL221-T, Ready for use=y, Specification="650mA max, AEC-Q200 Qualified", Supplier=Digi-Key
J100: library part 0532610371, "3 pin horizontal picoblade connector", Manufacturer=Molex, Supplier Part No=WM7621CT-ND, Fitted=Fitted, Generic="Non Generic", Manufacturer Part No=0532610371, Package Ref=0532610371, Part Reference=0532610371, Ready for use=y, Specification="125 V 1 A max", Supplier=Digi-Key
J101: library part 2mm_pads_8, "2mm pitch solder pads", Fitted=Fitted, Generic=Generic, Manufacturer Part No=2mm_pads_8, Package Ref=2mm_pads_8, Part Reference=2mm_pads_8, Ready for use=n
J102: library part 61300311121, "3 pin vertical 2.54 mm header", Manufacturer="Würth Elektronik", Package Ref=2.54mm_header_vertical_male, Supplier Part No=732-5316-ND, Fitted=Fitted, Generic=Generic, Manufacturer Part No=61300311121, Part Reference=61300311121, Ready for use=n, Specification="250 V 3 A max", Supplier=Digi-Key
J200: "USB 2.0 Type C connector", Manufacturer="JAE Electronics", Supplier Part No=670-DX07S016JA1R1500CT-ND, Fitted=Fitted, Generic="Non Generic", Manufacturer Part No=DX07S016JA1R1500, Package Ref=DX07S016JA1R1500, Part Reference=DX07S016JA1R1500, Ready for use=y, Supplier=Digi-Key
M100 M101 M102: library part M1.6_Close_Unplated, "M1.6 Hole, Unplated", Fitted=Fitted, Generic=Generic, Package Ref=M1.6_Close_Unplated, Part Reference=M1.6_Close_Unplated, Ready for use=y, Specification="Close clearance"
M103 M104 M105 M106: library part M2_Normal_Unplated, "M2 Hole, Unplated", Fitted=Fitted, Generic=Generic, Package Ref=M2_Normal_Unplated, Part Reference=M2_Normal_Unplated, Ready for use=y, Specification="Normal clearance"
M107 M108: library part M2_Close_Unplated, "M2 Hole, Unplated", Fitted=Fitted, Generic=Generic, Package Ref=M2_Close_Unplated, Part Reference=M2_Close_Unplated, Ready for use=y, Specification="Close clearance"
R100 R101 R400 R401: library part CRCW06032K20JNEA, "General purpose automotive thick film resistor", Manufacturer="Vishay Dale", Package Ref=R0603, Supplier Part No=541-2.2KGCT-ND, Generic=Generic, Manufacturer Part No=CRCW06032K20JNEA, Part Reference=CRCW06032K20JNEA, Ready for use=y, Specification="5%, 200ppm, 0.1W, AEC-Q200 Qualified", Supplier=Digi-Key
  R100 R101: Fitted="Not Fitted"
  R400 R401: Fitted=Fitted
R200 R205: library part CRCW06031K00JNEA, "General purpose automotive thick film resistor", Manufacturer="Vishay Dale", Package Ref=R0603, Supplier Part No=541-1.0KGCT-ND, Fitted=Fitted, Generic=Generic, Manufacturer Part No=CRCW06031K00JNEA, Part Reference=CRCW06031K00JNEA, Ready for use=y, Specification="5%, 200ppm, 0.1W, AEC-Q200 Qualified", Supplier=Digi-Key
R201 R204: library part CRCW06035K10FKEA, "General purpose automotive thick film resistor", Manufacturer="Vishay Dale", Package Ref=R0603, Supplier Part No=541-5.10KHCT-ND, Fitted=Fitted, Generic=Generic, Manufacturer Part No=CRCW06035K10FKEA, Part Reference=CRCW06035K10FKEA, Ready for use=y, Specification="1%, 100ppm, 0.1W, AEC-Q200 Qualified", Supplier=Digi-Key
R202 R203: library part CRCW060327R0JNEA, "General purpose automotive thick film resistor", Manufacturer="Vishay Dale", Package Ref=R0603, Supplier Part No=541-27GCT-ND, Fitted=Fitted, Generic=Generic, Manufacturer Part No=CRCW060327R0JNEA, Part Reference=CRCW060327R0JNEA, Ready for use=y, Specification="5%, 200ppm, 0.1W, AEC-Q200 Qualified", Supplier=Digi-Key
R206 R300 R301 R302 R303 R304 R305: library part CRCW060310K0JNEA, "General purpose automotive thick film resistor", Manufacturer="Vishay Dale", Package Ref=R0603, Supplier Part No=541-10KGCT-ND, Fitted=Fitted, Generic=Generic, Manufacturer Part No=CRCW060310K0JNEA, Part Reference=CRCW060310K0JNEA, Ready for use=y, Specification="5%, 200ppm, 0.1W, AEC-Q200 Qualified", Supplier=Digi-Key
R500 R501: library part CRCW060310R0JNEA, "General purpose automotive thick film resistor", Manufacturer="Vishay Dale", Package Ref=R0603, Supplier Part No=541-10GCT-ND, Fitted=Fitted, Generic=Generic, Manufacturer Part No=CRCW060310R0JNEA, Part Reference=CRCW060310R0JNEA, Ready for use=y, Specification="5%, 200ppm, 0.1W, AEC-Q200 Qualified", Supplier=Digi-Key
R502 R503 R506 R507: library part CRCW2512330RJNEG, "General purpose automotive thick film resistor", Manufacturer="Vishay Dale", Package Ref=R2512, Supplier Part No=541-330XCT-ND, Fitted=Fitted, Generic=Generic, Manufacturer Part No=CRCW2512330RJNEG, Part Reference=CRCW2512330RJNEG, Ready for use=y, Specification="5%, 200ppm, 1W, AEC-Q200 Qualified", Supplier=Digi-Key
R504 R505: library part CRCW0603100RJNEA, "General purpose automotive thick film resistor", Manufacturer="Vishay Dale", Package Ref=R0603, Supplier Part No=541-100GCT-ND, Fitted=Fitted, Generic=Generic, Manufacturer Part No=CRCW0603100RJNEA, Part Reference=CRCW0603100RJNEA, Ready for use=y, Specification="5%, 200ppm, 0.1W, AEC-Q200 Qualified", Supplier=Digi-Key
R508: library part CRCW06030000Z0EA, "General purpose automotive thick film resistor", Manufacturer="Vishay Dale", Package Ref=R0603, Supplier Part No=541-0.0GCT-ND, Fitted=Fitted, Generic=Generic, Manufacturer Part No=CRCW06030000Z0EA, Part Reference=CRCW06030000Z0EA, Ready for use=y, Specification="<20mR, 2A Imax, AEC-Q200 Qualified", Supplier=Digi-Key
SW200 SW201: library part 434133025816, "SPST Tactile Switch 4.2x3.2 mm", Manufacturer="Wurth Elektronik", Supplier Part No=732-13663-1-ND, Fitted=Fitted, Generic="Non Generic", Manufacturer Part No=434133025816, Package Ref=434133025816, Part Reference=434133025816, Ready for use=y, Supplier=Digi-Key
TP100 TP101 TP102 TP103 TP201 TP202: library part 5019, "SMD Testpoint, loop style", Manufacturer="Keystone Electronics", Supplier Part No=36-5019CT-ND, Fitted=Fitted, Generic=Generic, Manufacturer Part No=5019, Package Ref=5019, Part Reference=5019, Ready for use=y, Supplier=Digi-Key
TP200: library part TP_SMD, "SMD Testpoint, pad style", Fitted=Fitted, Generic=Generic, Package Ref=TP_SMD, Part Reference=TP_SMD, Ready for use=y
U100: "3.3V 700mA LDO linear regulator", Manufacturer="Torex Semiconductor", Package Ref=SOT-25-5, Supplier Part No=893-1143-1-ND, Fitted=Fitted, Generic="Non Generic", Manufacturer Part No=XC6222B331MR-G, Part Reference=XC6222B331MR-G, Ready for use=y, Supplier=Digi-Key, Type=PMIC
U200: "128 Mbit SPI/QSPI Flash memory", Manufacturer="Winbond Electronics", Package Ref="8-SOIC WIDE (5mm)", Supplier Part No=W25Q128JVSIQ-ND, Fitted=Fitted, Generic="Non Generic", Manufacturer Part No=W25Q128JVSIQ, Part Reference=W25Q128JVSIQ, Ready for use=y, Supplier=Digi-Key, Type="Flash Memory"
U201: "Dual Core 133 MHz ARM-M0 Microcontroller", Manufacturer="Raspberry Pi", Package Ref="QFN-56 (7x7)", Supplier Part No=2648-SC0908(7)CT-ND, Fitted=Fitted, Generic="Non Generic", Manufacturer Part No=RP2040, Part Reference=RP2040, Ready for use=y, Supplier=Digi-Key, Type=Microcontroller
U300: library part TMC6300-LA-T, "2-11V 2A 3-phase BLDC motor driver", Manufacturer="Trinamic Motion Control GmbH", Package Ref="QFN-20 (3x3)", Supplier Part No=1460-TMC6300-LA-TCT-ND, Fitted=Fitted, Generic="Non Generic", Manufacturer Part No=TMC6300-LA-T, Part Reference=TMC6300-LA-T, Ready for use=y, Supplier=Digi-Key, Type="Motor Driver"
U400: library part MT6701CT-STD, "Hall effect absolute magnetic encoder", Manufacturer=MagnTek, Package Ref=SOP-8, Supplier Part No=C2856764, Fitted=Fitted, Generic="Non Generic", Manufacturer Part No=MT6701CT-STD, Part Reference=MT6701CT-STD, Ready for use=y, Supplier=LCSC, Type=Sensor
U500: library part MCP3564RT-E/ST, "Low-noise 24-bit Delta-Sigma ADC, 2/4/8 ch single ended, 1/2/4 ch differential", Manufacturer="Microchip Technology", Package Ref=20-TSSOP, Supplier Part No=150-MCP3564RT-E/STCT-ND, Fitted=Fitted, Generic="Non Generic", Manufacturer Part No=MCP3564RT-E/ST, Part Reference=MCP3564RT-E/ST, Ready for use=y, Supplier=Digi-Key, Type=ADC
U600: library part SN74LV1T34DBVR, "Single Buffer CMOS Level Shifter", Manufacturer="Texas Instruments", Package Ref=SOT-25-5, Supplier Part No=296-37176-1-ND, Fitted=Fitted, Generic=Generic, Manufacturer Part No=SN74LV1T34DBVR, Part Reference=SN74LV1T34DBVR, Ready for use=y, Supplier=Digi-Key, Type=Logic
X200: library part ECS-120-20-33-CKM-TR, "12 MHz 10ppm crystal oscillator", Manufacturer="ECS Inc", Package Ref="XTAL 3.2x2.5mm", Supplier Part No=XC1810CT-ND, Comments="XTAL for RP2040", Fitted=Fitted, Generic="Non Generic", Manufacturer Part No=ECS-120-20-33-CKM-TR, Part Reference=ECS-120-20-33-CKM-TR, Ready for use=y, Specification="20pF, 100R", Supplier=Digi-Key

## Via types
v1: diameter 0.8, hole 0.4, Top Layer to Bottom Layer, tented both sides, 140 vias

## Nets (pads, with @x,y where several pads share a name; then routed paths per layer and width w, separated by ;. In a path a pad name is that pad's centre, name@x,y a point inside that pad or via, vN(x,y) a via of type N, cw(c..) or ccw(c..) an arc to the next point about the centre after c; other vN are vias at no path point)
+3V3: C100.1 C102.1 C200.1 C201.1 C202.1 C203.1 C204.1 C205.1 C206.1 C207.1 C208.1 C305.1 C400.1 FB500.2 J101.1 R100.2 R101.2 R206.2 R400.2 R401.2 R501.2 TP103.1 U100.5 U200.8 U201.1 U201.10 U201.22 U201.33 U201.42 U201.43 U201.44 U201.48 U201.49 U300.11 U400.1 U400.2 | length 97.5
  Top Layer w0.203: C204.1@-33.875,-26.5 -32.5,-26.5 -31.8,-27.2 U201.22@-30.375,-27.2 U201.22@-30.373,-27.202 ; C201.1@-27.5,-32.875 U201.33@-27.5,-30.875 ; C202.1@-27,-20.625 -27,-21.28 -27.5,-21.78 U201.10@-27.5,-23.125 -27.5,-24 -27,-24.5 -24.5,-24.5 -23.9,-23.9 U201.1@-23.9,-23.125 -23.9,-22.4 -23.161,-21.661 -23.161,-21.286 C206.1@-23,-21.125 -22.22,-21.125 -21.845,-20.75 v1(-21.75,-20.75) ; U201.42@-23.9,-30.875 -23.9,-32.775 C203.1@-24,-32.875 C207.1@-22.5,-32.875 ; U201.43@-22.625,-29.6 -22.625,-32.75 C207.1@-22.5,-32.875 ; U201.44@-22.625,-29.2 -22.05,-29.2 -21,-30.25 C208.1@-21,-32.875 C207.1@-22.5,-32.875 ; U201.48@-22.625,-27.6 -21.5,-27.6 ; U201.49@-22.625,-27.2 -21.619,-27.2 -21.5,-27.319 -21.5,-27.6 ; C205.1@-16.875,-28.75 -18.75,-28.75 -19.9,-27.6 -21.5,-27.6 ; U300.11@26.925,-25.05 27.8,-25.05 28,-25.25 C305.1@28.875,-25.25
  Top Layer w0.254: R206.2@-29.85,-34.75 -29.75,-34.65 -29.75,-33.75 -29.697,-33.697 -29.697,-33.447 v1(-29.593,-33.343) -29.125,-32.875 C201.1@-27.5,-32.875 ; v1(-15,-37.8) -14.856,-37.8 -14.556,-37.5 R100.2@-13.75,-37.5 R101.2@-13.75,-36 ; U200.8@-12.105,-21.095 -12.09,-21.11 -9.515,-21.11 C200.1@-9.5,-21.125 -9.437,-21.187 -8.313,-21.187 v1(-8.25,-21.25) ; U400.1@2.725,-1.905 U400.2@2.725,-0.635 U400.2@2.73,-0.63
  Top Layer w0.305: v1(-22.25,19.25) R501.2@-22.25,20.6 ; C208.1@-21,-32.875 -18.525,-32.875 v1(-18,-33.4) ; v1(-6.25,-3) -6.25,-4 -3.81,-6.44 -3.81,-9.69 v1(-3.75,-9.75) -0.25,-9.75 2.725,-6.775 U400.1@2.725,-1.905 2.772,-1.953 4.952,-1.953 v1(5,-2) ; C305.1@28.875,-25.25 28.937,-25.312 28.937,-26.437 v1(29,-26.5)
  Top Layer w0.508: FB500.2@-20.57,21.5 -20.535,21.465 -20.535,20.285 v1(-20.5,20.25) ; U100.5@14.95,-27.725 C100.1@17,-27.725 v1(17,-26.5) ; v1(20.8,-35) TP103.1@23,-35
  Bottom Layer w0.254: C102.1@-10.848,-20.902 -10.848,-20.825 -8.55,-18.527 J101.1@-8.55,-18.45 v1(-7.5,-19.5)
  Bottom Layer w0.305: R400.2@-6.5,-1.9 -6.345,-2.055 -6.345,-2.905 v1(-6.25,-3) -5.429,-3 -5.186,-2.757 -5.186,-2.086 R401.2@-5,-1.9 ; v1(5,-2) C400.1@5,-0.625
  other v1: -18,-28.75 -8,-28.5 -7,-28.5 -6,-28.5 -32.75,-26.5 -8.2,-24 -7.2,-24 -6.2,-24
+5V_USB: C101.1 C300.1 C301.1 C302.1 C303.1 C600.1 C601.1 C602.1 C603.1 C604.1 C605.1 C606.1 C607.1 C608.1 D600.2 D601.2 D602.2 D603.2 D604.2 D605.2 D606.2 D607.2 F200.2 TP102.1 U100.1 U100.3 U300.18 U600.5 | length 220.8
  Top Layer w0.203: U300.18@25.5,-22.825 C301.1@25.5,-20.75 ; C301.1@25.5,-20.625 C302.1@25.5,-19 C303.1@25.5,-17
  Top Layer w0.305: C600.1@-23.75,7.625 -23.427,7.646 -21.998,7.646 U600.5@-21.85,7.75 -21.768,8.048 -21.768,8.759 cw(c-21.464,8.759) -21.539,9.054 -18.25,9.894 ; v1(-19.75,-7.25) -17.409,-10.761 ccw(c-17.155,-10.593) -17.003,-10.857 -16.716,-10.692 C608.1@-16.45,-10.508 -16.269,-10.175 -15.545,-9.57 D607.2@-15.405,-9.318 ; D600.2@-15.772,8.682 -16.06,8.678 -16.974,9.005 C601.1@-17.353,9.009 -17.557,9.29 -18.107,9.635 cw(c-17.945,9.894) -18.25,9.894 ; D601.2@-9.318,15.405 -9.57,15.545 -10.175,16.269 C602.1@-10.508,16.45 ; D606.2@-8.682,-15.772 -8.678,-16.06 -9.002,-16.947 C607.1@-8.992,-17.325 -8.66,-17.144 -6.039,-18.571 -5.409,-18.913 ; -5.409,-18.914 cw(c-5.555,-19.181) -5.25,-19.181 -5.25,-24.124 ccw(c-4.945,-24.124) -5.16,-24.34 -4.339,-25.161 ccw(c-4.124,-24.945) -4.124,-25.249 3.874,-25.25 ; 3.875,-25.25 ccw(c3.874,-24.945) 4.089,-25.161 4.911,-24.339 cw(c5.126,-24.555) 5.126,-24.25 8.75,-24.25 ; 5.424,18.668 cw(c5.555,18.943) 5.25,18.943 5.25,24.374 ccw(c4.945,24.374) 5.161,24.589 4.589,25.161 ccw(c4.374,24.945) 4.374,25.25 -3.874,25.25 ccw(c-3.874,24.945) -4.089,25.161 -5.161,24.089 ccw(c-4.945,23.874) -5.25,23.874 -5.25,21.174 cw(c-5.555,21.174) -5.4,20.911 -10.717,17.77 ccw(c-10.562,17.507) -10.777,17.723 -10.849,17.651 ccw(c-10.633,17.436) -10.897,17.283 -10.6,16.769 C602.1@-10.508,16.45 ; 5.425,18.668 8.66,17.144 C603.1@8.992,17.325 ; D602.2@8.682,15.772 8.678,16.06 9.002,16.947 C603.1@8.992,17.325 ; F200.2@8.75,-27.725 8.75,-24.25 ; D605.2@9.102,-15.53 9.353,-15.67 9.959,-16.394 C606.1@10.291,-16.575 ; D603.2@15.405,9.318 15.545,9.57 16.269,10.175 C604.1@16.45,10.508 ; 15.535,-13.209 cw(c15.301,-13.013) 15.453,-13.277 10.325,-16.238 C606.1@10.291,-16.575 ; 15.535,-13.208 17.929,-10.335 ccw(c17.695,-10.14) 18,-10.14 18,-9.652 ccw(c17.695,-9.652) 17.848,-9.388 17.564,-9.224 C605.1@17.325,-8.992 ; D604.2@15.772,-8.682 16.06,-8.678 16.947,-9.002 C605.1@17.325,-8.992 ; 17.861,10.58 21.409,5.139 ccw(c21.665,5.305) 21.665,5 24.143,5 cw(c24.143,4.695) 24.333,4.933 ; 17.861,10.58 ccw(c17.606,10.413) 17.518,10.705 16.828,10.498 C604.1@16.45,10.508 ; 24.333,4.933 25.386,4.092 cw(c25.195,3.854) 25.5,3.854 25.5,-3.874 cw(c25.195,-3.874) 25.411,-4.089 24.339,-5.161 cw(c24.124,-4.945) 24.124,-5.25 19.676,-5.25 ccw(c19.676,-5.555) 19.412,-5.402 17.435,-8.827 C605.1@17.325,-8.992 ; -18.25,9.894 -18.25,10.212 cw(c-17.945,10.212) -18.241,10.286 -18.029,11.132 cw(c-17.734,11.059) -17.899,11.315 -10.518,16.072 C602.1@-10.508,16.45 ; 8.75,-24.25 8.75,-20.25 10.5,-18.5 10.5,-17.09 10.291,-16.881 C606.1@10.291,-16.575 ; C603.1@8.992,17.325 9.325,17.506 9.82,18.082 cw(c10.051,17.883) 10.187,18.157 11.426,17.537 cw(c11.29,17.264) 11.544,17.432 11.545,17.431 16.072,10.518 C604.1@16.45,10.508
  Top Layer w0.508: U100.3@12.25,-29.625 12.25,-32.5 11,-33.75 9.871,-33.75 9,-34.621 TP102.1@9,-35 8.94,-33.254 8.94,-28.171 F200.2@8.75,-27.725 C101.1@10.5,-27.725 U100.1@12.25,-27.725 12.25,-26 16.5,-21.75 20,-21.75 ; C300.1@20,-23.25 20,-21.75 ; C301.1@25.5,-20.721 22.279,-20.721 21.25,-21.75 20,-21.75
  Int2 w0.305: v1(-19.75,-7.25) -18.75,-7.25 -7.5,-18.5 v1(-6,-18.5)
AGND: C500.2 C501.2 C504.2 C505.2 R506.1 R507.1 R508.1 U500.2 U500.3 | length 15
  Top Layer w0.305: U500.2@-15.55,27.725 -14.423,27.725 -14.148,28 v1@-14.069,28 ; U500.3@-15.55,28.375 -14.444,28.375 v1@-14.069,28 ; R508.1@-13.5,23.15 -13.625,23.275 -13.625,26.125 -14,26.5 v1(-14,28) ; C501.2@-12.75,27.125 -12.948,27.323 -13.323,27.323 v1(-14,28) ; v1@-14.069,28 v1(-14,28)
  Bottom Layer w0.508: v1(-26.5,2.5) -26.462,2.462 -26.462,0.037 R507.1@-26.425,0 ; R506.1@12.675,0 12.712,0.038 12.712,2.462 v1(12.75,2.5)
  other v1: -10.25,27.5 -10.25,33